# EAGLE board rgb-board (EAGLE 7.7.0)
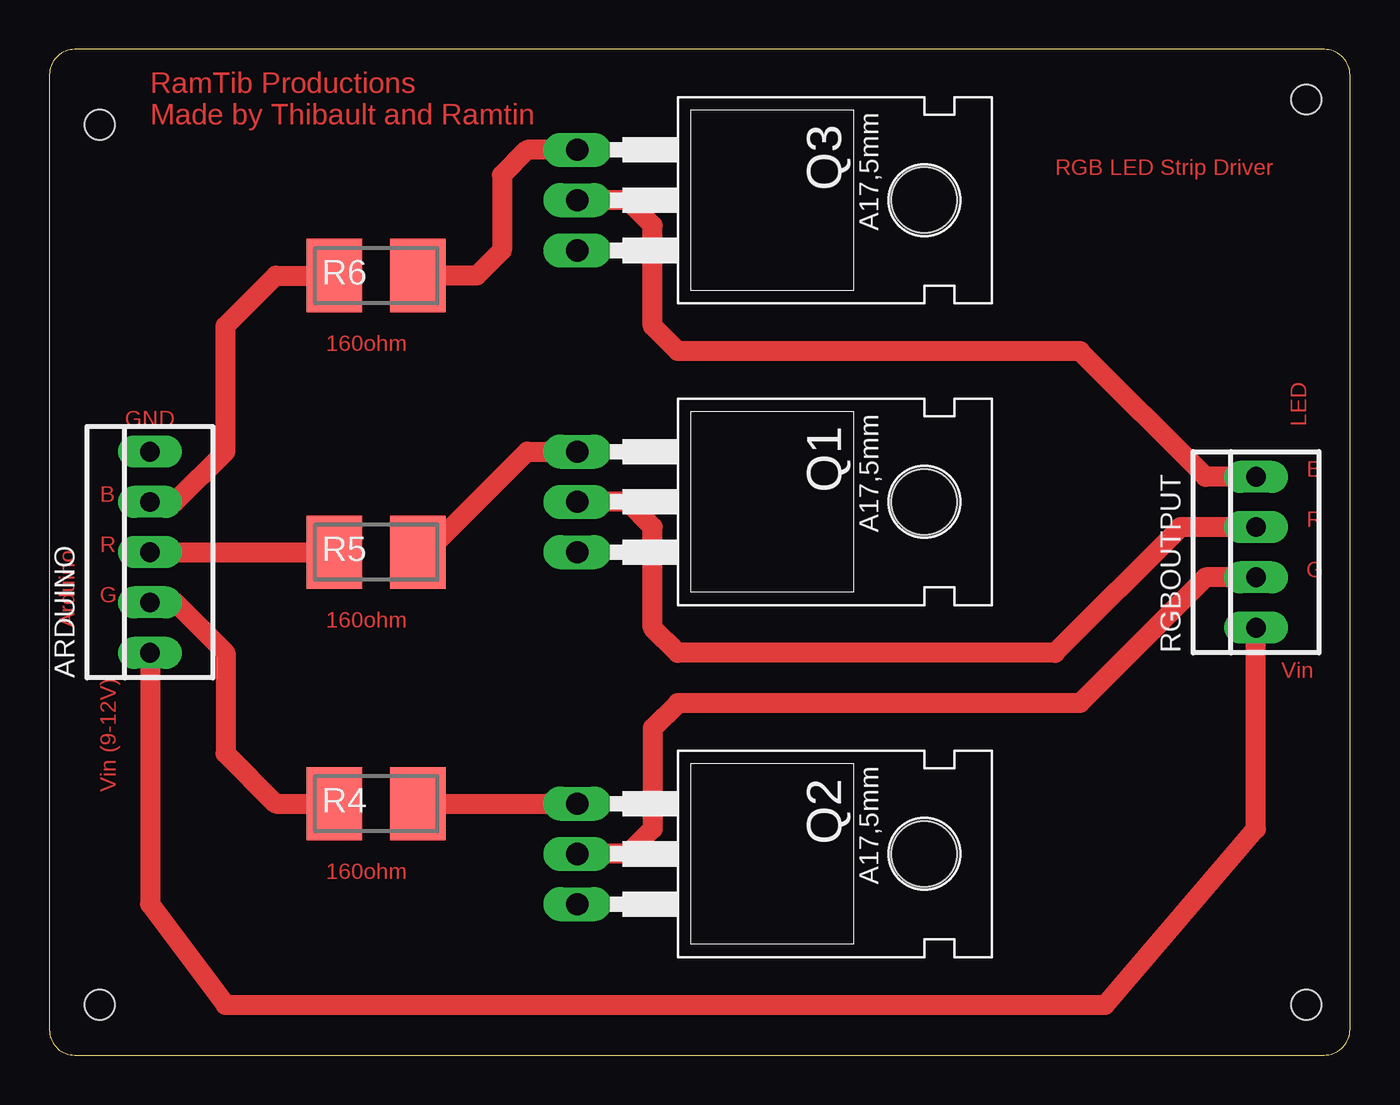
[diagram p0: board, top side]
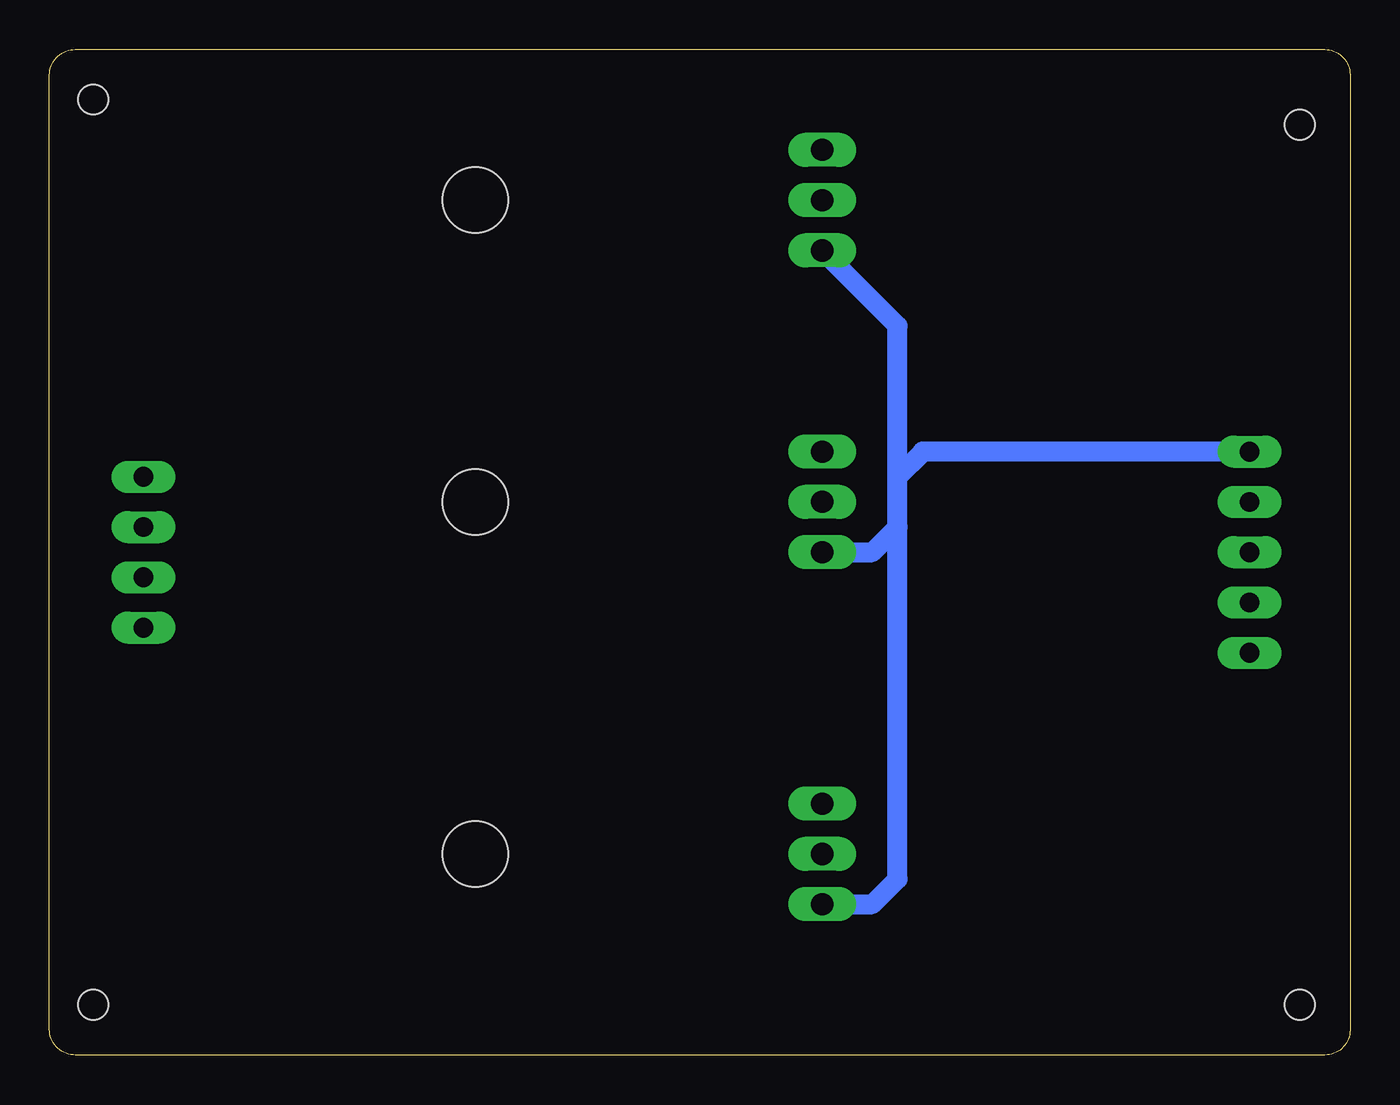
[diagram p1: board, bottom side, seen from below]

Size 65.71 x 50.79 mm. Coordinates in mm from the lower left corner, seen from the top.
Outline: 0,49.52 0,1.27 arc90 1.27,0 64.4,0 arc90 65.71,1.31 65.71,49.49 arc90 64.41,50.79 1.27,50.79 arc90 0,49.52
Copper layers (1*16): Top 0.035mm / dielectric 1.5mm / Bottom 0.035mm
Design rules "SparkFun": minimum track width 8mil, minimum drill 20mil, track to track 8mil, track to pad 8mil, pad to pad 8mil, via to via 8mil, smd to smd 8mil, copper to edge 8mil, drill to drill 8mil, minimum pad ring 12mil, minimum via ring 10mil, stop-mask expansion 4mil, vias tented up to drill 20mil, thermal gap 10mil
Holes 1.5 mm at 2.54,2.54 2.54,46.99 63.5,48.26 63.5,2.54

## Footprints (pad centres in the part's own frame; a part is rotated, then mirrored left to right if it is on the bottom)
22-23-2051 = drill 1 long: 1 -5.08,0; 2 -2.54,0; 3 0,0; 4 2.54,0; 5 5.08,0
TO220 = drill 1.118 long: 1 -2.54,-6.35; 2 0,-6.35; 3 2.54,-6.35 | hole 3.302: 0,11.176
SMS-WAV = smd 2.8 x 3.7: 1 2.108,0; 2 -2.108,0
22-23-2041 = drill 1 long: 1 -3.81,0; 2 -1.27,0; 3 1.27,0; 4 3.81,0

## Placement (x,y rotation side)
ARDUINO  22-23-2051  [22-23-2051]  5.08,25.4 90 top
Q1  MOSFET  [TO220]  33.02,27.94 270 top
Q2  MOSFET  [TO220]  33.02,10.16 270 top
Q3  MOSFET  [TO220]  33.02,43.18 270 top
R4  160ohm  [SMS-WAV]  16.51,12.7 0 top
R5  160ohm  [SMS-WAV]  16.51,25.4 0 top
R6  160ohm  [SMS-WAV]  16.51,39.37 0 top
RGBOUTPUT  LED STRIP  [22-23-2041]  60.96,25.4 90 top

## Library data of the parts
ARDUINO = con-molex; MF: MOLEX; MPN: 22-23-2051; OC_FARNELL: 1462952; OC_NEWARK: 38C9178
Q1-Q3 = transistor-fet
R4-R6 = resistor-shunt; OC_FARNELL: unknown; OC_NEWARK: unknown
RGBOUTPUT = con-molex; MF: MOLEX; MPN: 22-23-2041; OC_FARNELL: 1462920; OC_NEWARK: 38C0355

## Nets
BLUE: Q3.2 RGBOUTPUT.4
BLUE2: ARDUINO.4 R6.2
GND: ARDUINO.5 Q1.3 Q2.3 Q3.3
GREEN: Q2.2 RGBOUTPUT.2
GREEN2: ARDUINO.2 R4.2
N$5: Q2.1 R4.1
N$6: Q1.1 R5.1
N$7: Q3.1 R6.1
RED: Q1.2 RGBOUTPUT.3
RED2: ARDUINO.3 R5.2
VIN: ARDUINO.1 RGBOUTPUT.1

## Tracks (layer width: path | path; a pad name or v marks a point on that pad's centre or on a via)
BLUE
  Top 1.016: RGBOUTPUT.4 58.42,29.21 52.07,35.56 31.75,35.56 30.48,36.83 30.48,41.91 29.21,43.18 Q3.2
BLUE2
  Top 1.016: ARDUINO.4 6.35,27.94 8.89,30.48 8.89,36.83 11.43,39.37 R6.2
GND
  Bottom 1.016: Q2.3 24.13,7.62 22.86,8.89 22.86,26.67 | 22.86,26.67 22.86,29.21 | 22.86,29.21 22.86,36.83 Q3.3 | Q1.3 24.13,25.4 22.86,26.67 | ARDUINO.5 21.59,30.48 22.86,29.21
GREEN
  Top 1.016: RGBOUTPUT.2 58.42,24.13 52.07,17.78 31.75,17.78 30.48,16.51 30.48,11.43 29.21,10.16 Q2.2
GREEN2
  Top 1.016: ARDUINO.2 6.35,22.86 8.89,20.32 8.89,15.24 11.43,12.7 R4.2
N$5
  Top 1.016: R4.1 Q2.1
N$6
  Top 1.016: R5.1 19.05,25.4 24.13,30.48 Q1.1
N$7
  Top 1.016: Q3.1 24.13,45.72 22.86,44.45 22.86,40.64 21.59,39.37 R6.1
RED
  Top 1.016: RGBOUTPUT.3 57.15,26.67 50.8,20.32 31.75,20.32 30.48,21.59 30.48,26.67 29.21,27.94 Q1.2
RED2
  Top 1.016: ARDUINO.3 R5.2
VIN
  Top 1.016: ARDUINO.1 5.08,7.62 8.89,2.54 53.34,2.54 60.96,11.43 RGBOUTPUT.1

## Text on the board
Top: RamTib Productions / Made by Thibault and Ramtin | RGB LED Strip Driver | 160ohm | GND | LED | B | B | R | R | G | G | Arduino | 160ohm | Vin (9-12V) | Vin | 160ohm